# EAGLE board AP4BP-module-breakout_rev_a-v5 (EAGLE 9.7.0)
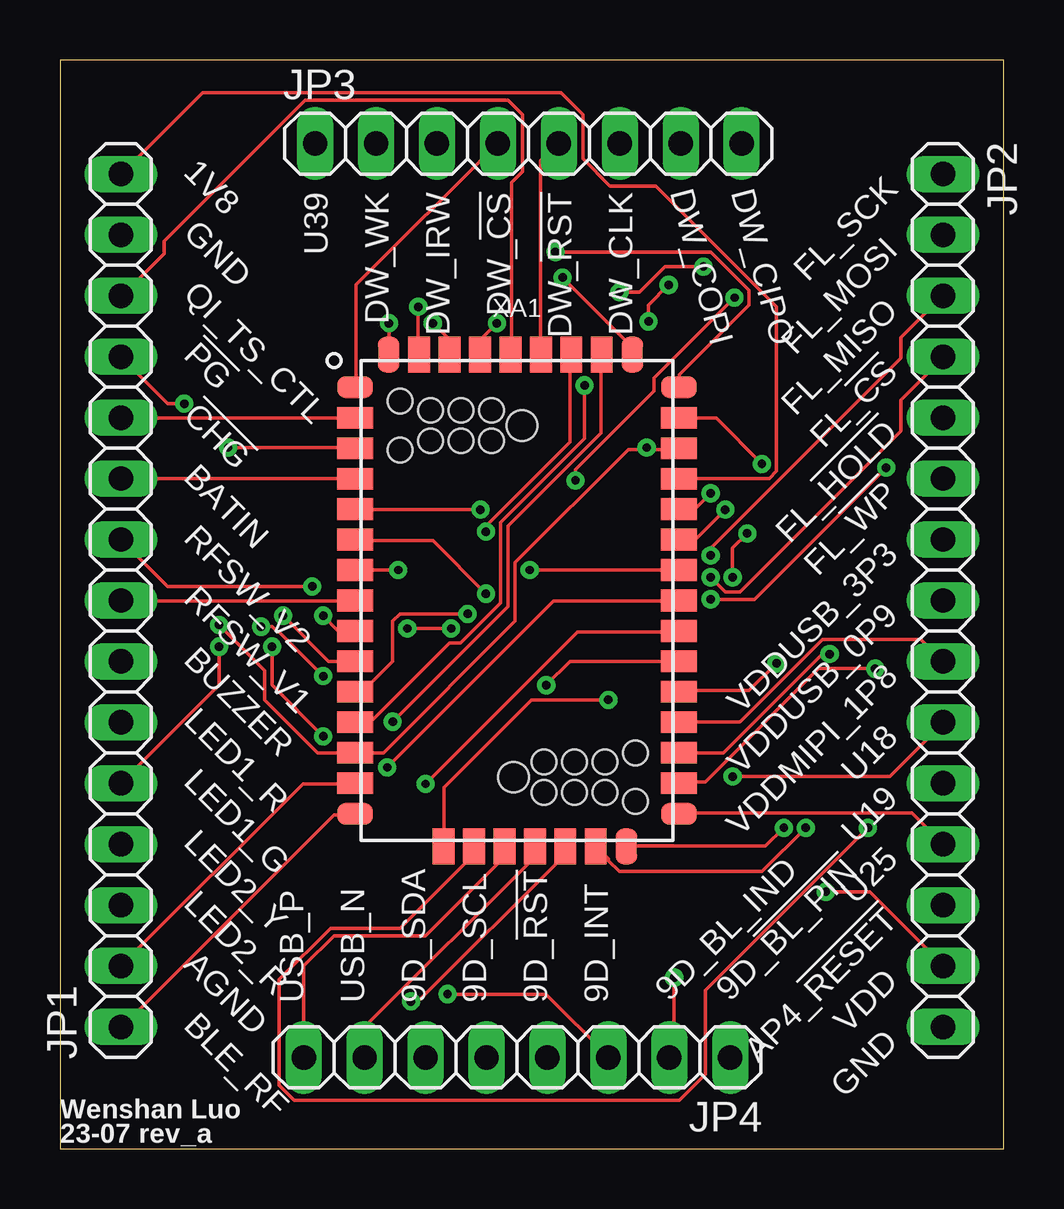
[diagram p0: board, top side]
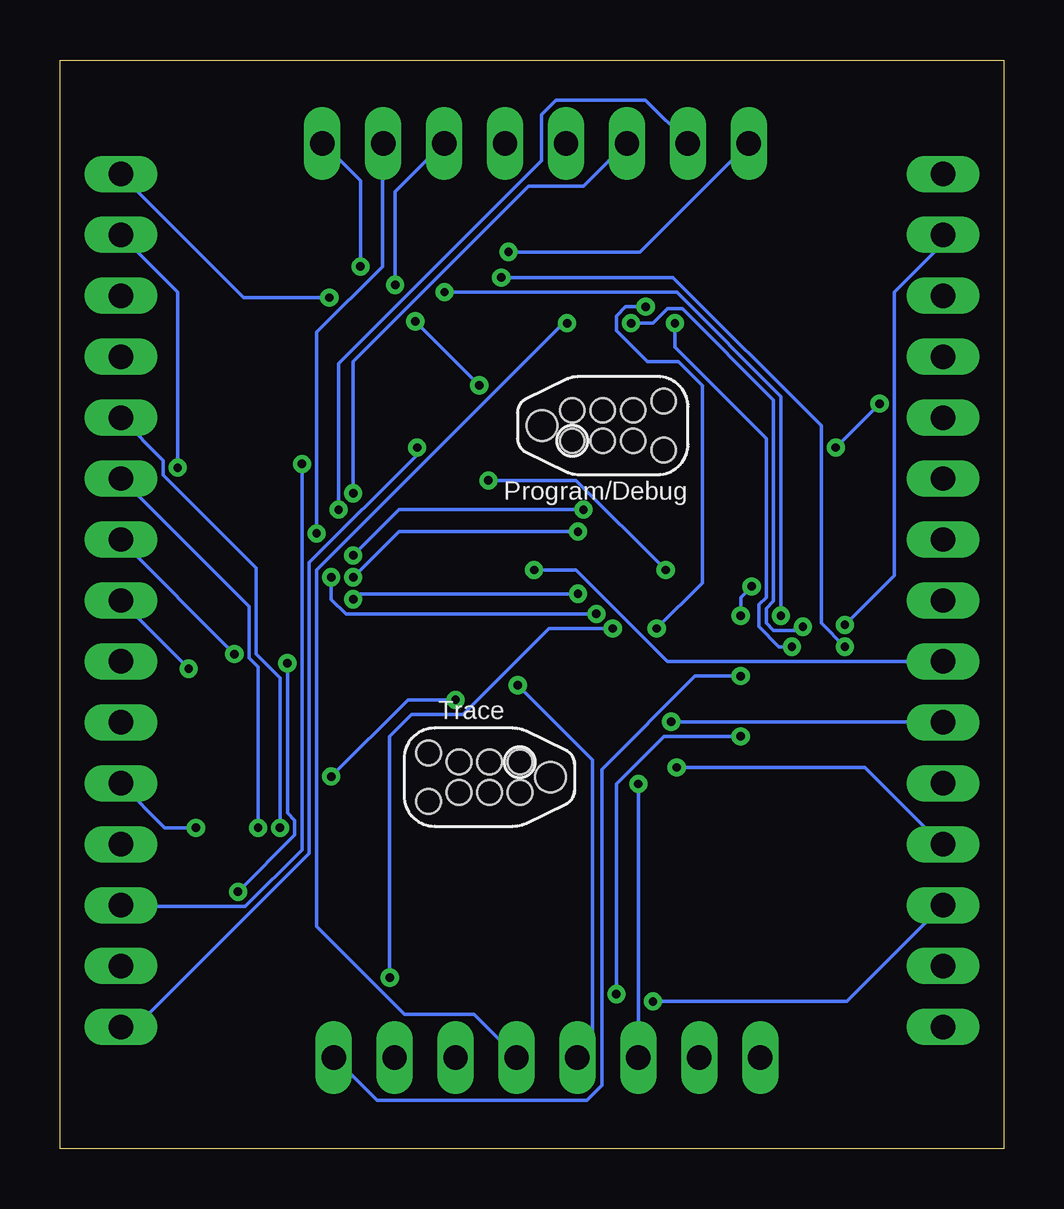
[diagram p1: board, bottom side, seen from below]

Size 39.35 x 45.39 mm. Coordinates in mm from the lower left corner, seen from the top.
Outline: 0,0 39.35,0 39.35,45.39 0,45.39 0,0
Copper layers (1*16): Top 0.035mm / dielectric 1.5mm / Bottom 0.035mm
Design rules "default": minimum track width 6mil, minimum drill 0.35mm, track to track 6mil, track to pad 6mil, pad to pad 6mil, via to via 6mil, smd to smd 6mil, copper to edge 40mil, drill to drill 6mil, minimum pad ring 10mil, minimum via ring 8mil, stop-mask expansion 4mil, vias tented up to drill 0mil, thermal gap 10mil

## Footprints (pad centres in the part's own frame; a part is rotated, then mirrored left to right if it is on the bottom)
1X15 = drill 1.016 long: 1 -17.78,0; 2 -15.24,0; 3 -12.7,0; 4 -10.16,0; 5 -7.62,0; 6 -5.08,0; 7 -2.54,0; 8 0,0; 9 2.54,0; 10 5.08,0; 11 7.62,0; 12 10.16,0; 13 12.7,0; 14 15.24,0; 15 17.78,0
1X08 = drill 1.016 long: 1 -8.89,0; 2 -6.35,0; 3 -3.81,0; 4 -1.27,0; 5 1.27,0; 6 3.81,0; 7 6.35,0; 8 8.89,0
APOLLO4_BLUEPLUS_MODULE = smd 1.5 x 0.9: P1 -6.75,8.89; P2 -6.75,7.62; P3 -6.75,6.35; P4 -6.75,5.08; P5 -6.75,3.81; P6 -6.75,2.54; P7 -6.75,1.27; P8 -6.75,0; P9 -6.75,-1.27; P10 -6.75,-2.54; P11 -6.75,-3.81; P12 -6.75,-5.08; P13 -6.75,-6.35; P14 -6.75,-7.62; P15 -6.75,-8.89; P25 6.75,-8.89; P26 6.75,-7.62; P27 6.75,-6.35; P28 6.75,-5.08; P29 6.75,-3.81; P30 6.75,-2.54; P31 6.75,-1.27; P32 6.75,0; P33 6.75,1.27; P34 6.75,2.54; P35 6.75,3.81; P36 6.75,5.08; P37 6.75,6.35; P38 6.75,7.62; P39 6.75,8.89 | smd 0.9 x 1.5: P18 -3.06,-10.25; P19 -1.79,-10.25; P20 -0.52,-10.25; P21 0.75,-10.25; P22 2.02,-10.25; P23 3.29,-10.25; P24 4.56,-10.25; P40 4.81,10.25; P41 3.54,10.25; P42 2.27,10.25; P43 1,10.25; P44 -0.27,10.25; P45 -1.54,10.25; P46 -2.81,10.25; P47 -4.08,10.25; P48 -5.35,10.25 | hole 1.27: -0.143,-7.366; 0.213,7.29 | hole 1.016: 4.937,-6.35; 4.937,-8.382; 1.127,-8.001; 1.127,-6.731; 2.397,-8.001; 2.397,-6.731; 3.667,-6.731; 3.667,-8.001; -4.867,6.274; -4.867,8.306; -1.057,7.925; -1.057,6.655; -2.327,7.925; -2.327,6.655; -3.597,6.655; -3.597,7.925

## Placement (x,y rotation side)
JP1  PINHD-1X15  [1X15]  2.54,22.86 90 top
JP2  PINHD-1X15  [1X15]  36.81,22.86 270 top
JP3  PINHD-1X8  [1X08]  19.53,41.91 0 top
JP4  PINHD-1X8  [1X08]  19.05,3.81 180 top
XA1  APOLLO4_BLUEPLUS_MODULE  [APOLLO4_BLUEPLUS_MODULE]  19.05,22.86 0 top

## Library data of the parts
JP1 = Connector; CATEGORY: Headers; DESCRIPTION: Header, Straight, 15 Position; MANUFACTURER: Generic; MPN: Generic; OPERATING_TEMPERATURE: Generic; PART_STATUS: Active; PITCH: 0.100" (2.54mm); ROHS_COMPLIANCE: Generic; SERIES: Generic; SUB-CATEGORY: Headers, Male Pins; TYPE: Board to Board or Cable, Unshrouded, Through Hole, Straight
JP2-JP4 = Connector; CATEGORY: CONNECTOR; SUB-CATEGORY: PIN-HEADER
XA1 = Quorvo

## Nets
+1V8: JP1.15 XA1.P36
AGND: JP1.2 XA1.P14
AP4_!RESET: JP2.13 XA1.P38
AP4_GP06/TT_FLASH_!HOLD: JP2.5 XA1.P24
AP4_GP08/TT_9DOF_SCL-COM1: JP4.5 XA1.P30
AP4_GP09/TT_9DOF_SDA-COM0: JP4.6 XA1.P31
AP4_GP13/TT_9DOF_!BL_PIN: JP4.1 XA1.P46
AP4_GP14/TT_9DOF_BL_IND: JP4.2 XA1.P47
AP4_GP17/TT_9DOF_INT: JP4.3 XA1.P48
AP4_GP18/TT_BATIN: JP1.10 XA1.P4
AP4_GP24/TT_RFSW_V1: JP1.8 XA1.P8
AP4_GP25/TT_RFSW_V2: JP1.9 XA1.P9
AP4_GP26/TT_DW_WAKEUP: JP3.2 XA1.P34
AP4_GP27/TT_DW_IRQ: JP3.3 XA1.P35
AP4_GP29/TT_!DW_SPI_CS: JP3.4 XA1.P1
AP4_GP30/TT_FLASH_!WP: JP2.6 XA1.P23
AP4_GP31/TT_DW_SPI_CLK: JP3.6 XA1.P12
AP4_GP32/TT_DW_SPI_IO0: JP3.7 XA1.P11
AP4_GP33/TT_DW_SPI_IO1: JP3.8 XA1.P10
AP4_GP47/TT_FLASH_SCK: JP2.1 XA1.P7
AP4_GP48/TT_FLASH_MOSI: JP2.2 XA1.P6
AP4_GP49/TT_FLASH_MISO: JP2.3 XA1.P5
AP4_GP50/TT_!DW_RESET: JP3.5 XA1.P43
AP4_GP51/LED1_GREEN: JP1.5 XA1.P40
AP4_GP53/LED1_RED: JP1.6 XA1.P41
AP4_GP55/TT_BUZZER_GATE: JP1.7 XA1.P33
AP4_GP58/TT_!CHG: JP1.11 XA1.P2
AP4_GP60/TT_!PG: JP1.12 XA1.P3
AP4_GP65/TT_9DOF_!RESET: JP4.4 XA1.P45
AP4_GP66/TT_QI_TS_CTRL: JP1.13 XA1.P44
AP4_GP69/TT_FLASH_!CS: JP2.4 XA1.P42
AP4_GP79/TT_LED2_RED: JP1.3 XA1.P22
AP4_GP88/TT_LED2_YELLOW: JP1.4 XA1.P32
AP4_USB0_N [USB_PHY]: JP4.7 XA1.P21
AP4_USB0_P [USB_PHY]: JP4.8 XA1.P20
AP4_VDDMIPI_1P8: JP2.9 XA1.P28
AP4_VDDUSB_0P9: JP2.8 XA1.P26
AP4_VDDUSB_3P3: JP2.7 XA1.P27
BLE_RFOUT [BLE_PHY]: JP1.1 XA1.P15
GND: JP1.14 JP2.15 XA1.P13 XA1.P37
P18_UNUSED: JP2.10 XA1.P18
P19_UNUSED: JP2.11 XA1.P19
P25_UNUSED: JP2.12 XA1.P25
P39_UNUSED: JP3.1 XA1.P39
VDD: JP2.14 XA1.P29

## Tracks (layer width: path | path; a pad name or v marks a point on that pad's centre or on a via)
+1V8
  Top 0.152: XA1.P36 29.57,27.94 29.87,28.25 29.87,35.1 24.84,40.13 22.94,40.13 21.79,41.27 21.79,43.1 20.88,44.02 5.94,44.02 2.59,40.66 JP1.15
AGND
  Top 0.152: JP1.2 10.13,15.21 12.27,15.21 XA1.P14
AP4_!RESET  (via drill 0.35)
  Top 0.152: v29.26,28.55 27.36,30.45 25.83,30.45 XA1.P38
  Bottom 0.152: v29.26,28.55 29.26,12.47 31.62,10.11 36.8,10.11 JP2.13
AP4_GP06/TT_FLASH_!HOLD  (via drill 0.35)
  Top 0.152: v30.18,13.39 29.41,12.62 23.62,12.62 XA1.P24
  Bottom 0.152: v30.18,13.39 30.18,19.63 31.17,20.62 31.17,24.21 35.05,28.09 35.05,28.7 36.8,30.45 JP2.5
AP4_GP08/TT_9DOF_SCL-COM1  (via drill 0.35)
  Top 0.152: XA1.P30 21.26,20.32 v20.27,19.33
  Bottom 0.152: v20.27,19.33 17.14,16.21 17.14,4.47 17.75,3.86 JP4.5
AP4_GP09/TT_9DOF_SDA-COM0  (via drill 0.35)
  Top 0.152: v15.24,15.21 21.57,21.54 25.76,21.54 XA1.P31
  Bottom 0.152: JP4.6 v15.24,15.21
AP4_GP13/TT_9DOF_!BL_PIN  (via drill 0.35)
  Top 0.152: v15.54,34.42 16.23,33.73 16.23,33.12 XA1.P46 | v8.38,21.77 8.84,21.77 9.07,21.54 9.14,21.54 v10.97,19.71
  Bottom 0.152: v15.54,34.42 14.63,34.42 14.02,35.03 13.41,35.03 9.6,31.22 9.6,22.84 9.91,22.53 9.91,21.92 9.6,21.62 8.53,21.62 v8.38,21.77 | v10.97,19.71 12.88,19.71 16.76,15.82 16.76,2.64 17.37,2.03 26.14,2.03 27.89,3.79 JP4.1
AP4_GP14/TT_9DOF_BL_IND  (via drill 0.35)
  Top 0.152: v14.94,35.1 14.94,33.12 XA1.P47 | v16.31,21.69 v14.48,21.69 | v25.6,7.14 25.6,4.01 JP4.2
  Bottom 0.152: v14.94,35.1 15.77,35.1 16.15,34.72 16.15,34.11 14.86,32.82 13.56,32.82 12.57,31.83 12.57,23.6 v14.48,21.69 | v16.31,21.69 18.97,21.69 22.55,18.11 24.69,18.11 25.6,17.2 v25.6,7.14
AP4_GP17/TT_9DOF_INT  (via drill 0.35)
  Top 0.152: v13.72,34.42 13.72,33.12 XA1.P48 | v8.84,20.93 8.84,19.33 v10.97,17.2 | v16.15,6.45 20.27,6.45 22.86,3.86 JP4.3
  Bottom 0.152: v13.72,34.42 13.72,33.43 9.91,29.62 9.91,22.99 10.21,22.68 10.21,21.77 9.37,20.93 v8.84,20.93 | v10.97,17.2 14.17,17.2 16.15,15.21 v16.15,6.45
AP4_GP18/TT_BATIN
  Top 0.152: JP1.10 XA1.P4
AP4_GP24/TT_RFSW_V1
  Top 0.152: XA1.P8 12.27,22.84 2.59,22.84 JP1.8
AP4_GP25/TT_RFSW_V2  (via drill 0.35)
  Top 0.152: v10.97,22.23 11.58,21.62 12.27,21.62 XA1.P9 | v10.52,23.44 4.5,23.44 JP1.9
  Bottom 0.152: v10.97,22.23 10.97,22.99 v10.52,23.44
AP4_GP26/TT_DW_WAKEUP  (via drill 0.35)
  Top 0.152: v27.74,26.64 26.52,25.43 25.83,25.43 XA1.P34
  Bottom 0.152: v27.74,26.64 27.74,32.74 19.28,41.2 19.28,43.1 18.67,43.71 14.94,43.71 13.18,41.96 JP3.2
AP4_GP27/TT_DW_IRQ  (via drill 0.35)
  Top 0.152: v27.13,27.33 26.52,26.72 25.83,26.72 XA1.P35
  Bottom 0.152: v27.13,27.33 27.13,32.82 19.81,40.13 17.53,40.13 15.77,41.88 JP3.3
AP4_GP29/TT_!DW_SPI_CS
  Top 0.152: XA1.P1 12.34,31.75 12.34,36.02 18.21,41.88 JP3.4
AP4_GP30/TT_FLASH_!WP  (via drill 0.35)
  Top 0.152: v31.09,13.39 29.26,11.56 23.32,11.56 22.86,12.01 22.86,12.09 22.4,12.55 XA1.P23
  Bottom 0.152: v31.09,13.39 31.09,20.09 31.47,20.47 31.47,22.61 JP2.6
AP4_GP31/TT_DW_SPI_CLK  (via drill 0.35)
  Top 0.152: v21.87,31.83 21.87,29.62 18.36,26.11 18.36,22.76 16.69,21.08 16.23,21.08 12.95,17.8 12.34,17.8 XA1.P12 | v24.54,34.49 24.54,35.18 v25.38,36.02
  Bottom 0.152: v24.54,34.49 v21.87,31.83 | v25.38,36.02 25.38,39.9 23.39,41.88 JP3.6
AP4_GP32/TT_DW_SPI_IO0  (via drill 0.35)
  Top 0.152: v16.99,22.3 14.17,22.3 13.87,22 13.87,20.32 12.65,19.1 12.34,19.1 XA1.P11 | v28.04,23.82 28.04,25.04 v28.65,25.65
  Bottom 0.152: v16.99,22.3 27.43,22.3 28.04,22.91 v28.04,23.82 | v28.65,25.65 28.65,34.04 25.91,36.78 25.91,41.88 JP3.7
AP4_GP33/TT_DW_SPI_IO1  (via drill 0.35)
  Top 0.152: XA1.P10 11.2,20.32 v9.3,22.23 | v23.32,35.71 24.16,35.71 25.22,36.78 v26.82,36.78
  Bottom 0.152: v9.3,22.23 9.3,31.37 13.64,35.71 v23.32,35.71 | v26.82,36.78 26.82,40.36 28.35,41.88 JP3.8
AP4_GP47/TT_FLASH_SCK  (via drill 0.35)
  Top 0.152: v14.1,24.13 XA1.P7 | v21.49,27.86 21.49,28.32 24.77,31.6 24.77,32.13 v28.12,35.48
  Bottom 0.152: v14.1,24.13 17.83,27.86 v21.49,27.86 | v28.12,35.48 31.7,35.48 36.8,40.59 JP2.1
AP4_GP48/TT_FLASH_MOSI  (via drill 0.35)
  Top 0.152: v17.75,23.14 15.54,25.35 12.34,25.35 XA1.P6 | v27.13,22.91 28.96,22.91 v34.44,28.4
  Bottom 0.152: v17.75,23.14 26.9,23.14 v27.13,22.91 | v34.44,28.4 34.44,35.71 36.8,38.08 JP2.2
AP4_GP49/TT_FLASH_MISO  (via drill 0.35)
  Top 0.152: v17.53,26.64 12.34,26.64 XA1.P5 | v27.13,24.74 27.13,25.04 35.05,32.97 35.05,33.81 JP2.3
  Bottom 0.152: v17.53,26.64 25.22,26.64 v27.13,24.74
AP4_GP50/TT_!DW_RESET
  Top 0.152: XA1.P43 20.04,33.12 20.04,41.2 20.73,41.88 JP3.5
AP4_GP51/LED1_GREEN  (via drill 0.35)
  Top 0.152: v20.95,36.32 23.85,33.43 23.85,33.12 XA1.P40 | v6.63,20.93 6.63,19.33 JP1.5
  Bottom 0.152: v20.95,36.32 13.79,36.32 7.62,30.15 7.62,21.92 v6.63,20.93
AP4_GP53/LED1_RED  (via drill 0.35)
  Top 0.152: v13.87,17.8 18.67,22.61 18.67,25.96 22.55,29.84 22.55,33.05 XA1.P41
  Bottom 0.152: v13.87,17.8 2.59,17.8 JP1.6
AP4_GP55/TT_BUZZER_GATE  (via drill 0.35)
  Top 0.152: v19.58,24.13 XA1.P33
  Bottom 0.152: v19.58,24.13 17.83,24.13 14.02,20.32 JP1.7
AP4_GP58/TT_!CHG
  Top 0.152: XA1.P2 12.27,30.45 2.59,30.45 JP1.11
AP4_GP60/TT_!PG  (via drill 0.35)
  Top 0.152: v7.01,29.23 12.27,29.23 XA1.P3 | v5.18,31.06 4.5,31.06 JP1.12
  Bottom 0.152: v5.18,31.06 v7.01,29.23
AP4_GP65/TT_9DOF_!RESET  (via drill 0.35)
  Top 0.152: v18.21,34.42 17.53,33.73 17.53,33.12 XA1.P45
  Bottom 0.152: v18.21,34.42 18.36,34.42 28.65,24.13 28.65,9.27 24.99,5.61 22.1,5.61 20.34,3.86 JP4.4
AP4_GP66/TT_QI_TS_CTRL
  Top 0.152: XA1.P44 18.82,33.12 18.82,40.28 19.28,40.74 19.28,43.1 18.67,43.71 10.21,43.71 4.34,37.85 4.34,37.31 2.59,35.56 JP1.13
AP4_GP69/TT_FLASH_!CS  (via drill 0.35)
  Top 0.152: v17.75,25.73 17.75,25.96 21.26,29.46 21.26,33.05 XA1.P42 | v27.13,23.82 27.74,23.22 28.35,23.22 35.05,29.92 35.05,31.22 36.8,32.97 JP2.4
  Bottom 0.152: v17.75,25.73 25.22,25.73 v27.13,23.82
AP4_GP79/TT_LED2_RED  (via drill 0.35)
  Top 0.152: v14.63,6.15 14.94,6.15 21.03,12.24 21.03,12.55 XA1.P22
  Bottom 0.152: v14.63,6.15 6.55,6.15 JP1.3
AP4_GP88/TT_LED2_YELLOW  (via drill 0.35)
  Top 0.152: v13.64,15.9 20.57,22.84 25.76,22.84 XA1.P32
  Bottom 0.152: v13.64,15.9 5.79,15.9 2.59,12.7 JP1.4
AP4_USB0_N
  Top 0.152: JP4.7 12.7,5.08 19.8,12.18 XA1.P21
AP4_USB0_P
  Top 0.152: JP4.8 10.16,7.62 11.43,8.89 15.24,8.89 18.53,12.18 XA1.P20
AP4_VDDMIPI_1P8
  Top 0.152: XA1.P28 25.83,17.8 28.35,17.8 31.77,21.23 35.89,21.23 JP2.9
AP4_VDDUSB_0P9  (via drill 0.35)
  Top 0.152: v33.98,20.02 31.62,20.02 26.9,15.29 25.83,15.29 XA1.P26
  Bottom 0.152: v33.98,20.02 36.8,22.84 JP2.8
AP4_VDDUSB_3P3  (via drill 0.35)
  Top 0.152: XA1.P27 27.66,16.51 31.77,20.62 v32.08,20.62
  Bottom 0.152: v32.08,20.62 36.8,25.35 JP2.7
BLE_RFOUT
  Top 0.152: XA1.P15 12.27,13.92 11.43,13.92 2.59,5.08 JP1.1
GND  (via drill 0.35)
  Top 0.152: 24.46,29.16 25.76,29.16 XA1.P37 | 24.46,29.16 23.7,29.16 18.97,24.44 18.97,22 13.49,16.51 XA1.P13 10.74,16.51 8.53,18.72 8.53,19.94 v6.63,21.84 | 24.46,29.16 v24.46,29.23
  Bottom 0.152: v6.63,21.84 4.57,23.9 4.57,35.71 2.59,37.69 2.59,38.08 JP1.14 | JP2.15 36.2,5.08 28.96,12.32 28.96,24.44 24.46,28.93 v24.46,29.23
P18_UNUSED  (via drill 0.35)
  Top 0.152: v22.86,18.72 19.66,18.72 16,15.06 16,12.62 XA1.P18 | v28.04,15.52 34.59,15.52 36.8,17.73 JP2.10
  Bottom 0.152: v22.86,18.72 24.84,18.72 v28.04,15.52
P19_UNUSED  (via drill 0.35)
  Top 0.152: v33.68,13.39 26.9,6.6 26.9,3.1 25.83,2.03 9.75,2.03 9.14,2.64 9.14,7.06 11.28,9.2 14.17,9.2 17.22,12.24 17.22,12.55 XA1.P19
  Bottom 0.152: v33.68,13.39 34.98,13.39 36.8,15.21 JP2.11
P25_UNUSED
  Top 0.152: XA1.P25 25.83,14 35.51,14 JP2.12
P39_UNUSED  (via drill 0.35)
  Top 0.152: v20.65,37.39 27.13,37.39 28.73,35.79 28.73,35.18 25.83,32.28 25.83,31.75 XA1.P39
  Bottom 0.152: v20.65,37.39 15.16,37.39 10.67,41.88 JP3.1
VDD  (via drill 0.35)
  Top 0.152: v29.87,20.24 28.73,19.1 25.83,19.1 XA1.P29 | v31.93,10.72 33.76,10.72 36.8,7.67 JP2.14
  Bottom 0.152: v29.87,20.24 29.87,14 29.57,13.69 29.57,13.08 v31.93,10.72

## Text on the board
tPlace: 1V8 | FL_SCK | U39 | DW_WK | DW_IRW | DW_!CS | DW_!RST | DW_CLK | DW_COPI | DW_CIPO | GND | FL_MOSI | QI_TS_CTL | FL_MISO | !PG | FL_!CS | !CHG | FL_!HOLD | BATIN | FL_!WP | RFSW_V2 | VDDUSB_3P3 | RFSW_V1 | VDDUSB_0P9 | BUZZER | VDDMIPI_1P8 | LED1_R | U18 | LED1_G | U19 | LED2_Y | U25 | LED2_R | AP4_!RESET | AGND | VDD | USB_P | USB_N | 9D_SDA | 9D_SCL | 9D_!RST | 9D_INT | 9D_BL_IND | 9D_!BL_PIN | BLE_RF | GND | Wenshan Luo | 23-07 rev_a